# Altium PCB 000.000.001 rev.2.PcbDoc
Units mm, origin at the board's own origin, x right, y up, seen from the top; angles counter-clockwise.
Board outline 111 x 55 mm, 2 copper layers (Top Layer, Bottom Layer), stack 1.571 mm thick; 79 components, 88 nets, 351 pads, 348 vias.
Unrouted connection lines stored in the file: 42.
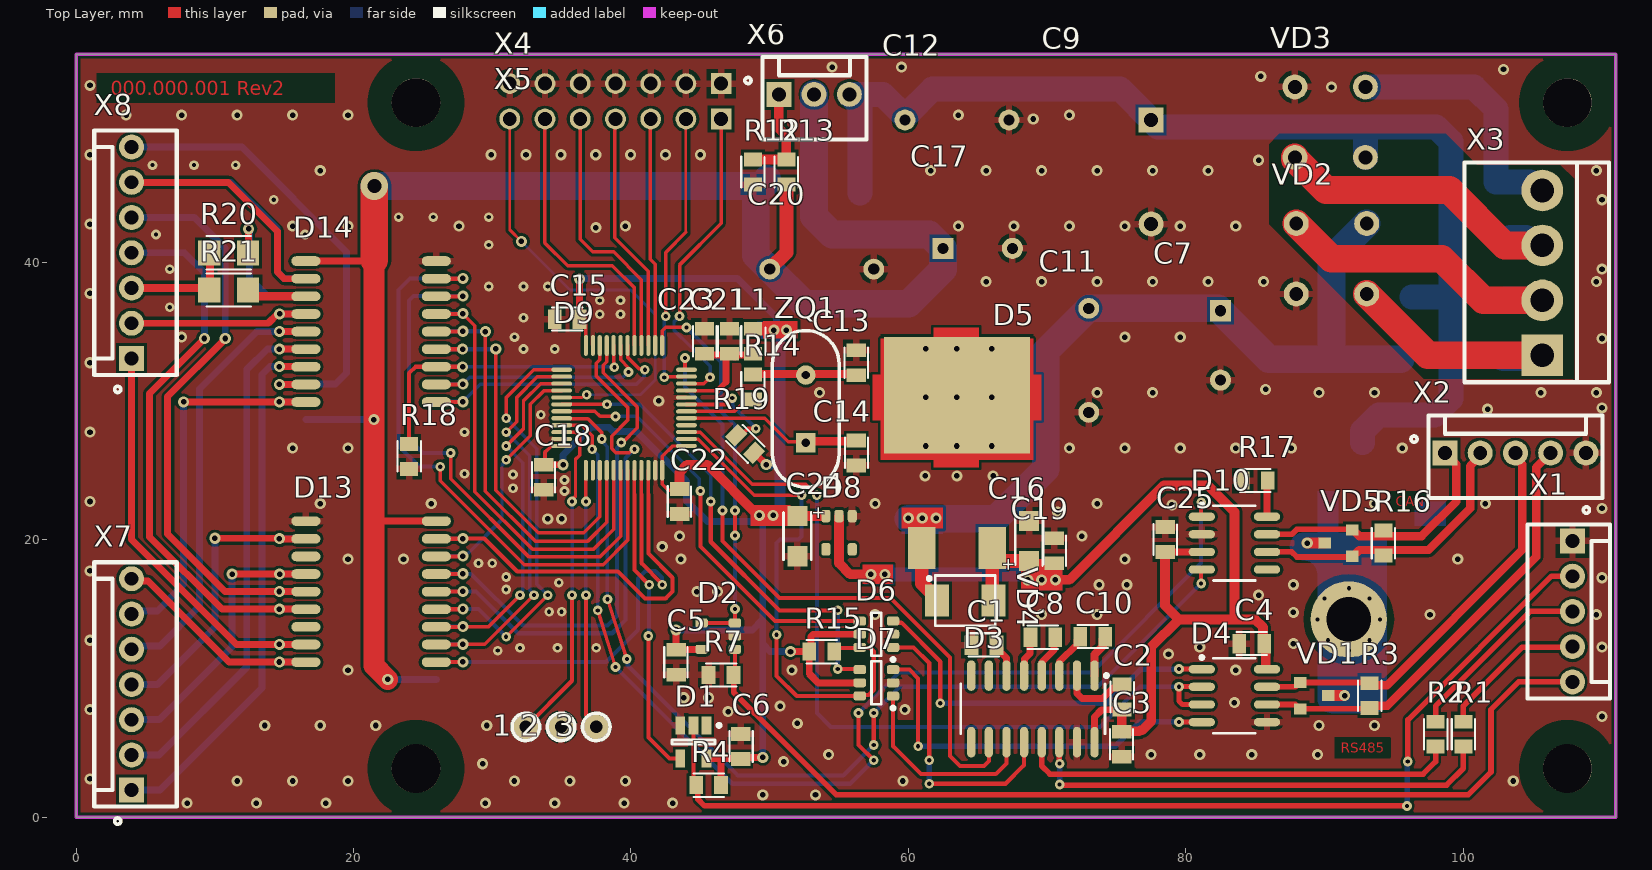
[diagram p0: Top Layer view]
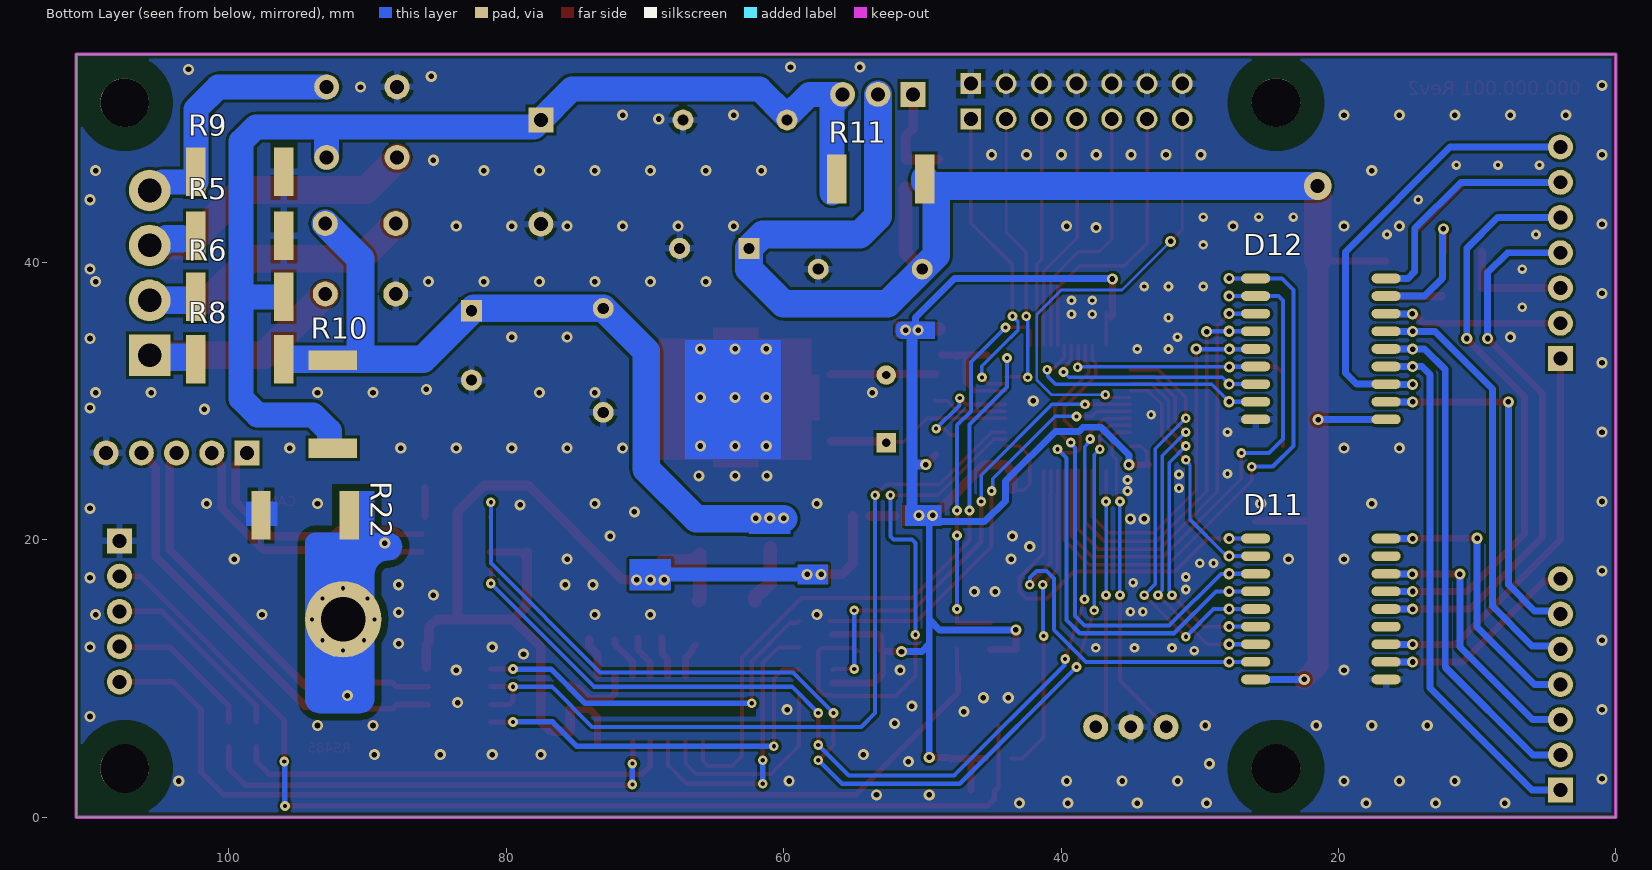
[diagram p1: Bottom Layer view, seen from below]
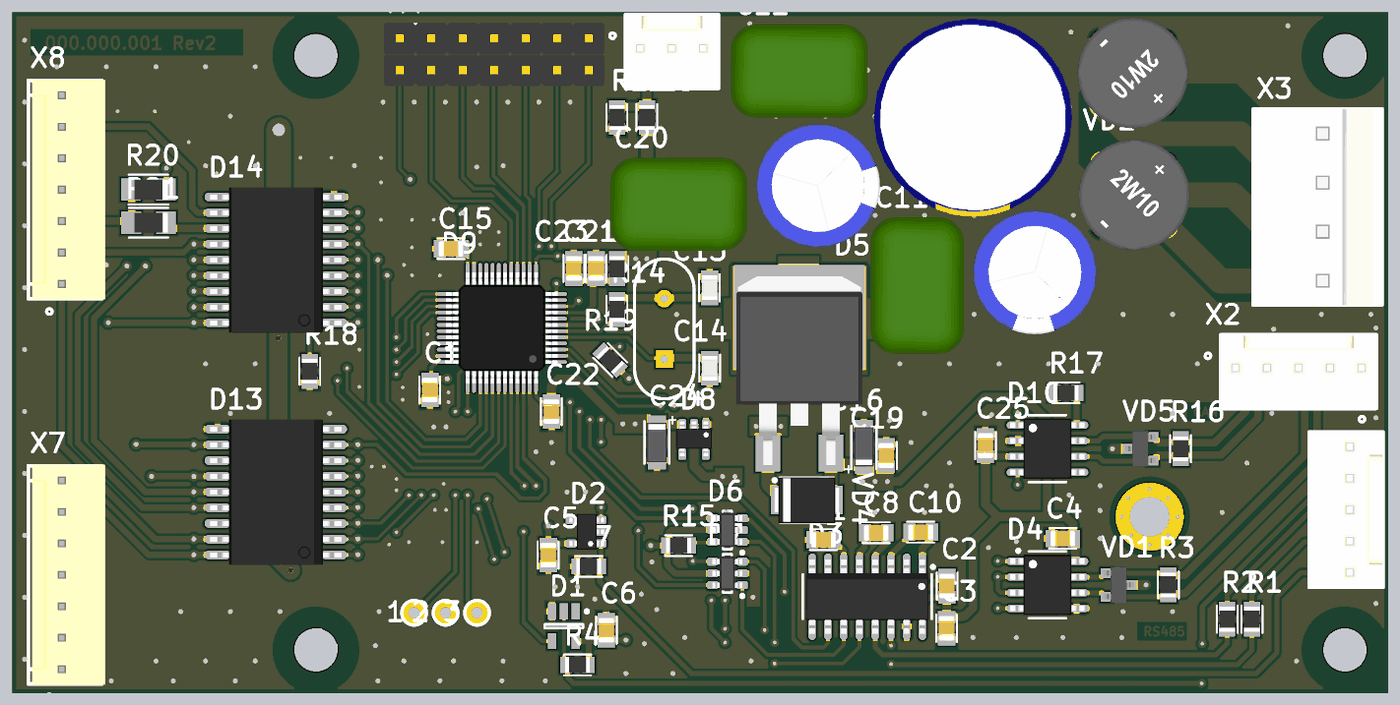
[diagram p2: 3D render of the assembled board from above, using the file's embedded part models]
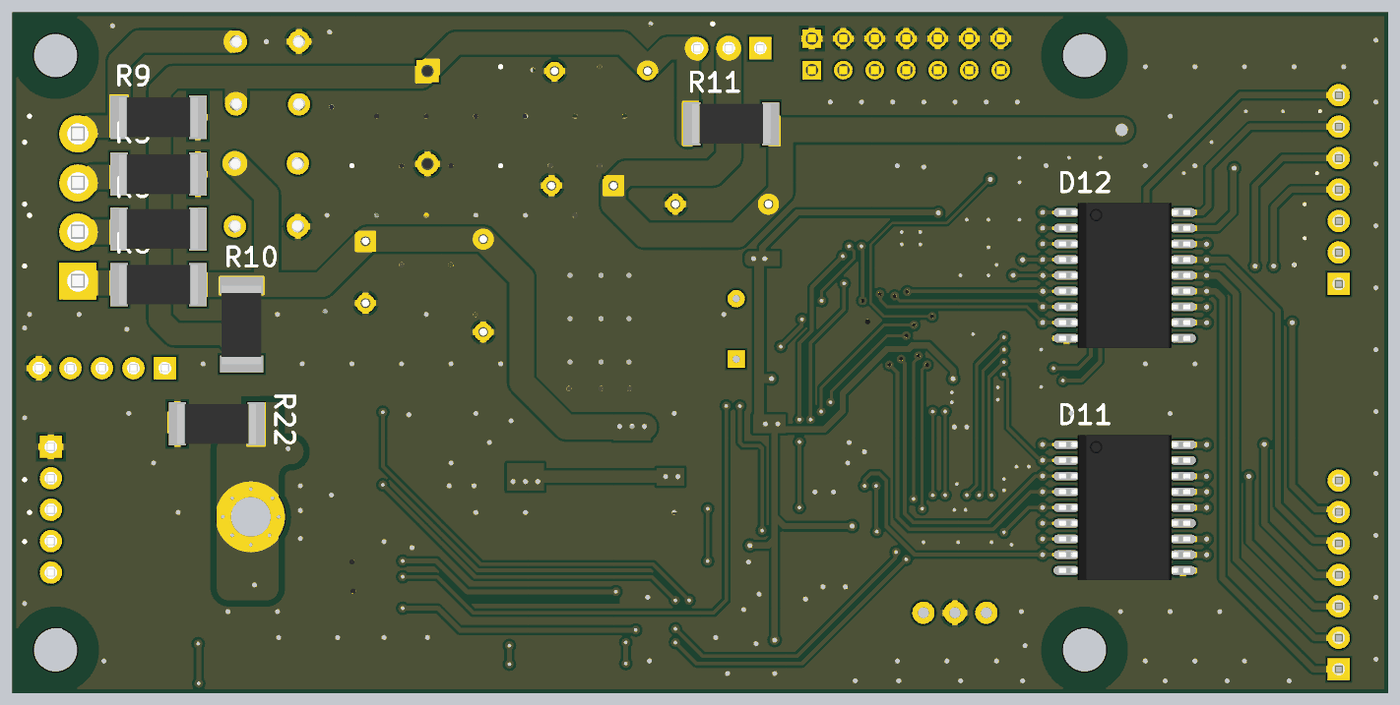
[diagram p3: 3D render of the assembled board from below, using the file's embedded part models]

## Layer stack, top to bottom
Top Solder: solder mask 0.0102, Solder Resist, Dk 3.5
Top Layer: signal copper 0.0356
Dielectric 1: dielectric 1.5, FR-4, Dk 4.8
Bottom Layer: signal copper 0.0356
Bottom Solder: solder mask 0.0102, Solder Resist, Dk 3.5

## Board outline
0,0 111,0 111,55 0,55

## Design rules (kind name [scope] priority, off if disabled: settings)
BoardOutlineClearance BoardOutlineClearance_Connector [(InComponentClass('Connectors') OR OnLayer('Bottom Overlay') OR OnLayer('Top Overlay'))] p1: gap=0 ignorepadtopadclearanceinfootprint=FALSE
BoardOutlineClearance [All] p2: gap=0.3 ignorepadtopadclearanceinfootprint=FALSE
Clearance Clearance_GND_E [InNet('GND_E') vs InNet('GND')] p1: gap=0.5 ignorepadtopadclearanceinfootprint=FALSE
Clearance [All] p2: gap=0.2 ignorepadtopadclearanceinfootprint=FALSE except(0.3: Arc-Poly)
ComponentClearance [All] p1: gap=0 collisioncheckmode=3 verticalgap=0 showdistances=FALSE
Height [All] p1: minheight=0 maxheight=50 prefheight=12.7
HoleSize [All] p1: absolutevalues=TRUE maxlimit=5 minlimit=0.025 maxpercent=80.000 minpercent=20.000
MinimumSolderMaskSliver [All] p1: minsoldermaskwidth=0
PolygonConnect PolygonConnect_MCU [InComponent('D9')] p1: thpad.connectstyle=Relief thpad.reliefconductorwidth=0.3 thpad.reliefentries=4 thpad.polygonreliefangle="90 Angle" thpad.airgapwidth=0.254 smdpad.connectstyle=Relief smdpad.reliefconductorwidth=0.3 smdpad.reliefentries=4 smdpad.polygonreliefangle="90 Angle" smdpad.airgapwidth=0.254 via.connectstyle=Direct via.reliefconductorwidth=0.254 via.reliefentries=4 via.polygonreliefangle="90 Angle" via.airgapwidth=0.254
PolygonConnect [All] p2: thpad.connectstyle=Relief thpad.reliefconductorwidth=0.5 thpad.reliefentries=4 thpad.polygonreliefangle="90 Angle" thpad.airgapwidth=0.3 smdpad.connectstyle=Relief smdpad.reliefconductorwidth=0.5 smdpad.reliefentries=4 smdpad.polygonreliefangle="90 Angle" smdpad.airgapwidth=0.25 via.connectstyle=Direct via.reliefconductorwidth=0.254 via.reliefentries=4 via.polygonreliefangle="90 Angle" via.airgapwidth=0.254
RoutingVias [All] p1: holewidth=0.4 width=0.8 viastyle="Through Hole" minholewidth=0.3 minwidth=0.7 maxholewidth=3 maxwidth=5
SilkToSilkClearance [All] p1: silktosilkclearance=0
SilkToSolderMaskClearance [IsPad] p1: minsilkscreentomaskgap=0 clearancetoexposedcopper=TRUE
SolderMaskExpansion [All] p1: expansion=0.102 istentingtop=FALSE
Width [All] p1: maxlimit=3 minlimit=0.2 preferedwidth=0.5
24 further rules are at their usual default settings.

## Classes and differential pairs
component class Connectors: X1 X2 X3 X4 X5 X6 X7 X8

## Components (designator, comment, footprint, x,y, rotation, side; value= is the part's Value field where it differs from the comment)
1 "=Value" PADROUND 32.42,6.5 r180 top
2 "=Value" PADROUND 34.96,6.5 r180 top
3 "=Value" PADROUND 37.5,6.5 r180 top
C1 "GRM21BR71H104KA01L (0805 X7R 0,1 мкФ ±10% 50 В)" CAP0805-125 65.45,12.4 r0 top
C2 "GRM21BR71H104KA01L (0805 X7R 0,1 мкФ ±10% 50 В)" CAP0805-125 75.4,8.65 r270 top
C3 "GRM21BR71E105KA99L (0805 X7R 1 мкФ ±10% 25 В)" CAP0805-125 75.375,5.25 r90 top
C4 "GRM21BR71E105KA99L (0805 X7R 1 мкФ ±10% 25 В)" CAP0805-125 84.75,12.5 r0 top
C5 "GRM21BR71H104KA01L (0805 X7R 0,1 мкФ ±10% 50 В)" CAP0805-125 43.25,11.16 r90 top
C6 "GRM21BR71H104KA01L (0805 X7R 0,1 мкФ ±10% 50 В)" CAP0805-125 47.925,5.088 r270 top
C7 "WLR102M1EG21 (1000 мкФ 25 В 10х21)" CAPR10x21 82.5,34 r90 top
C8 "GRM21BR71H104KA01L (0805 X7R 0,1 мкФ ±10% 50 В)" CAP0805-125 69.688,12.956 r0 top
C9 "TKR222M1VK25 (2200 мкФ 35 В 16х25)" CAPR16X25 77.5,46.5 r90 top
C10 "GRM21BR71H104KA01L (0805 X7R 0,1 мкФ ±10% 50 В)" CAP0805-125 73.288,13.006 r0 top
C11 "JFA02A104J (0,1 мкФ, 100 В, 5%)" JFA11x13x7.5 73,32.925 r90 top
C12 "JFA02A104J (0,1 мкФ, 100 В, 5%)" JFA11x13x7.5 63.5,50.25 r180 top
C13 "GRM2165C1H180JD01D (0805 NP0 18 пФ ±5% 50 В)" CAP0805-060_NP0 56.25,32.75 r90 top
C14 "GRM2165C1H180JD01D (0805 NP0 18 пФ ±5% 50 В)" CAP0805-060_NP0 56.25,26.25 r270 top
C15 "GRM21BR71H104KA01L (0805 X7R 0,1 мкФ ±10% 50 В)" CAP0805-125 35.4,35.9 r0 top
C16 "TECAP4.7/10VA10 ( тип А 4,7 мкФ 10 В ±10%)" 3216-18 68.7,19.9 r90 top
C17 "WLR102M1EG21 (1000 мкФ 25 В 10х21)" CAPR10X21 65,41 r180 top
C18 "GRM21BR71H104KA01L (0805 X7R 0,1 мкФ ±10% 50 В)" CAP0805-125 33.7,24.5 r90 top
C19 "GRM21BR71H104KA01L (0805 X7R 0.1 мкФ ±10% 50 В)" CAP0805-125 70.5,19.2 r270 top
C20 "JFA02A104J (0,1 мкФ, 100 В, 5%)" JFA11x13x7.5 53.75,39.5 r180 top
C21 "GRM21BR71E105KA99L (0805 X7R 1 мкФ ±10% 25 В)" CAP0805-125 47.1,34.3 r270 top
C22 "GRM21BR71H104KA01L (0805 X7R 0,1 мкФ ±10% 50 В)" CAP0805-125 43.5,22.75 r90 top
C23 "GRM21BR71H104KA01L (0805 X7R 0,1 мкФ ±10% 50 В)" CAP0805-125 45.3,34.3 r270 top
C24 "TECAP4.7/10VA10 ( тип А 4,7 мкФ 10 В ±10%)" 3216-18 52,20.25 r270 top
C25 "GRM21BR71E105KA99L (0805 X7R 1 мкФ ±10% 25 В)" CAP0805-125 78.5,20 r270 top
D1 "SN74AHC1G14DRLR" SOT23-5AM 44.5,5.413 r270 top
D2 "LMV321ILT" SOT23-5 46.291,13.045 r180 top
D3 "ST232BDR" SO16_N 68.975,7.8 r270 top
D4 "ST485ECDR" SOIC8N_L 83.5,8.75 r0 top
D5 "L78M05ABDT-TR" D2PAK 63.5,24.9 r0 top locked
D6 "SN74LVC1G3157DBVR" SOT23-6 57.69,13.18 r180 top
D7 "SN74LVC1G3157DBVR" SOT23-6 57.69,9.68 r180 top
D8 "MC78LC33NTRG" SOT23-5 55,20.5 r270 top
D9 "STM32F103C8T6" LQFP-48 39.5,29.5 r180 top locked
D10 "MCP2551-I/SN" SOIC8N_L 83.5,19.75 r0 top
D11 "TD62783AFG" SOP-18 21.266,15 r180 bottom
D12 "ULN2803ADWR" SOP-18 21.266,33.75 r180 bottom
D13 "TD62783AFG" SOP-18 21.266,16.25 r180 top
D14 "ULN2803ADWR" SOP-18 21.266,35 r180 top
L1 "LQM21PN4R7NGR (0805 4,7 мкГн 0,8 А 288 мОм)" LQM21-G 48.8,34.3 r270 top
R1 "RC0805FR-07240RL (0805 240 Ом ±1%)" RES0805-050 100,5.975 r270 top
R2 "RC0805FR-07240RL (0805 240 Ом ±1%)" RES0805-050 98,5.975 r270 top
R3 "RC0805FR-07120RL (0805 120 Ом ±1%)" RES0805-050 93.25,8.75 r270 top
R4 "RC0805FR-0710KL (0805 10 кОм ±1%)" RES0805-050 45.6,2.3 r180 top
R5 "RC2512FR-070RL (1206 0 Ом)" RES2512-055 99.2,41.92 r0 bottom
R6 "RC2512FR-070RL (1206 0 Ом)" RES2512-055 99.2,37.5 r0 bottom
R7 "RC0805FR-07150RL (0805 150 Ом ±1%)" RES0805-050 46.5,10.25 r180 top
R8 "RC2512FR-070RL (1206 0 Ом)" RES2512-055 99.2,33 r0 bottom
R9 "RC2512FR-070RL (1206 0 Ом)" RES2512-055 99.2,46.52 r0 bottom
R10 "RC2512FR-070RL (1206 0 Ом)" RES2512-055 92.5,29.75 r90 bottom
R11 "RC2512FR-070RL (1206 0 Ом)" RES2512-055 53,46 r180 bottom
R12 "RC0805FR-071K6L (0805 1,6 кОм ±1)" RES0805-050 48.8,46.5 r90 top
R13 "RC0805FR-07150RL (0805 150 Ом ±1%)" RES0805-050 51.2,46.5 r90 top
R14 "RC0805JR-0722R (0805 22 Ом ±5%)" RES0805-050 48.8,31 r90 top
R15 "RC0805FR-0710KL (0805 10 кОм ±1%)" RES0805-050 53.75,11.93 r180 top
R16 "RC0805FR-07120RL (0805 120 Ом ±1%)" RES0805-050 94.25,19.75 r90 top
R17 "RC0805FR-0727KL (0805 27 кОм ±1%)" RES0805-050 85,24.25 r0 top
R18 "RC0805FR-0710KL (0805 10 кОм ±1%)" RES0805-050 24,26 r270 top
R19 "RC0805FR-0710KL (0805 10 кОм ±1%)" RES0805-050 48.233,26.9 r315 top
R20 "RC1206FR-071KL (1206 1 кОм ±1%)" RES1206-055 10.99,40.68 r180 top
R21 "RC1206FR-071KL (1206 1 кОм ±1%)" RES1206-055 11,38 r180 top
R22 "RC2512FR-070RL (1206 0 Ом)" RES2512-055 94.5,21.75 r180 bottom
VD1 "CDSOT23-SM712" SOT23 89.25,8.75 r0 top
VD2 "2W10G-E4/51" 2W10 90.5,40.25 r270 top
VD3 "2W10G-E4/51" 2W10 90.4,50.1 r180 top
VD4 "S1G" DO-214AA 64.1,15.6 r0 top
VD5 "PESD2CAN,215" SOT23 91,19.75 r180 top
X1 "DS1070-5MVV6 (WF-05)" WF-05 107.875,14.825 r270 top locked
X2 "DS1070-5MVV6 (WF-05)" WF-05 103.759,26.25 r0 top locked
X3 "DS1072-4MVT6 (PWL-4)" PWL-4 105.7,39.23 r270 top
X4 "Соединитель штыревой PLS-7" PLS-2.54-7 46.5,52.876 r270 top
X5 "Соединитель штыревой PLS-7" PLS-2.54-7 46.5,50.325 r270 top
X6 "Connector 3" WF-03 53.2,52.1 r0 top value="DS1070-3MVV6 (WF-03)"
X7 "" WF-07 4,9.56 r90 top value="DS1070-7MVV6 (WF-7)"
X8 "" WF-07 4,40.68 r90 top value="DS1070-7MVV6 (WF-7)"
ZQ1 "8.000MHzHC-49US" KX-3H_spacer 52.6,29.425 r90 top

## Footprints (in the part's own frame and the unit in brackets; to place one, negate y for a bottom-side part, rotate by r counter-clockwise, add the part's x,y. Pads: shape width x height; smd on the part's side, far side on the other; paste and mask are expansions set on the pad)
2W10 [mm]
  round 1.8 hole 1: +(-2.54,2.54) -(2.54,-2.54) ~A(2.54,2.54) ~B(-2.54,-2.54)
  body extent -4.5,-4.5 4.5,4.5, height 7.3
3216-18 [mm] "Case A Tantalum"
  rect 1.45x1.45 smd: 1(-1.45,0) 2(1.45,0)
  silkscreen extent -1.7,-1 1.7,1, body extent -1.6,-0.8 1.6,0.8, height 1.53
CAP0805-060_NP0 [mm] "Chip capacitor, Body 2.0x1.2mm"
  rect 1x1.4 smd: 1(-0.9,0) 2(0.9,0)
  silkscreen extent -1.11,-0.83 1.1,0.85, body extent -1,-0.63 1,0.62, height 0.52
CAP0805-125 [mm] "Chip capacitor, Body 2.0x1.2mm 1.25 mm thickness"
  rect 1x1.4 smd: 1(-0.9,0) 2(0.9,0)
  silkscreen extent -1.11,-0.83 1.1,0.85, body extent -1,-0.63 1,0.63, height 1.42
CAPR10x21 [mm] "Pitch 5.0"
  rect 1.524x1.524 hole 0.8: 1(2.5,0)
  round 1.524 hole 0.8: 2(-2.5,0)
  body extent -5,-5 5,5, height 21.05
CAPR10X21 [mm] "Pitch 5.0"
  rect 1.524x1.524 hole 0.8: 1(2.5,0)
  round 1.524 hole 0.8: 2(-2.5,0)
  body extent -5,-5 5,5, height 21.05
CAPR16X25 [mm] "Pitch 7.5"
  rect 1.8x1.8 hole 1: 1(3.75,0)
  round 1.8 hole 1: 2(-3.75,0)
  body extent -8.01,-8 8,8, height 25.51
D2PAK [mm] "D2-PAK/TO-263-AB; 3 Leads (1 Cropped); Body 15.5 (inc. leads) x 10.5 mm (LxW max)"
  rect 2x3 smd: 1(-2.54,-5.5) 3(2.54,-5.5)
  rect 10.55x8.4 smd: 2(0,5.5)
  body extent -5.08,-6.5 5.08,8.76, height 4.88
DO-214AA [mm] "Diode"
  rect 1.72x2.3 smd: A(2.035,0) K(-2.035,0)
  silkscreen extent -2.72,-1.81 2.16,1.81, body extent -2.65,-1.85 2.65,1.85, height 2.2
JFA11x13x7.5 [mm] "JFA Mylar capacitor"
  round 1.5 hole 0.8: 1(-3.75,0) 2(3.75,0)
  body extent -5.5,-3.75 5.5,3.75, height 15
KX-3H_spacer [mm] "Quartz resonator with spacer"
  rect 1.4x1.4 hole 0.6: 1(-2.44,0)
  round 1.4 hole 0.6: 2(2.44,0)
  silkscreen extent -5.65,-2.4 5.65,2.4, body extent -5.68,-2.5 5.68,2.5, height 4.6
LQFP-48 [mm]
  oval 1.5x0.3 smd: 1(-4.5,2.75) 2(-4.5,2.25) 3(-4.5,1.75) 4(-4.5,1.25) 5(-4.5,0.75) 6(-4.5,0.25) 7(-4.5,-0.25) 8(-4.5,-0.75) 9(-4.5,-1.25) 10(-4.5,-1.75) 11(-4.5,-2.25) 12(-4.5,-2.75) 25(4.5,-2.75) 26(4.5,-2.25) 27(4.5,-1.75) 28(4.5,-1.25) 29(4.5,-0.75) 30(4.5,-0.25) 31(4.5,0.25) 32(4.5,0.75) 33(4.5,1.25) 34(4.5,1.75) 35(4.5,2.25) 36(4.5,2.75)
  oval 0.3x1.5 smd: 13(-2.75,-4.5) 14(-2.25,-4.5) 15(-1.75,-4.5) 16(-1.25,-4.5) 17(-0.75,-4.5) 18(-0.25,-4.5) 19(0.25,-4.5) 20(0.75,-4.5) 21(1.25,-4.5) 22(1.75,-4.5) 23(2.25,-4.5) 24(2.75,-4.5) 37(2.75,4.5) 38(2.25,4.5) 39(1.75,4.5) 40(1.25,4.5) 41(0.75,4.5) 42(0.25,4.5) 43(-0.25,4.5) 44(-0.75,4.5) 45(-1.25,4.5) 46(-1.75,4.5) 47(-2.25,4.5) 48(-2.75,4.5)
  body extent -4.5,-4.5 4.5,4.5, height 1.5
LQM21-G [mm] "Inductor"
  rect 1x1.3 smd: 1(-0.9,0) 2(0.9,0)
  silkscreen extent -1,-0.9 1,0.9, body extent -1,-0.63 1,0.62, height 0.82
PADROUND [mm] "Pad Round"
  round 1.8 hole 0.9: 1(0,0)
  silkscreen extent -1,-1 1,1
PLS-2.54-7 [mm]
  rect 1.5x1.5 hole 1: 1(0,0)
  round 1.5 hole 1: 2(0,-2.54) 3(0,-5.08) 4(0,-7.62) 5(0,-10.16) 6(0,-12.7) 7(0,-15.24)
  body extent -1.27,-16.51 1.27,1.27, height 8.54
PWL-4 [mm] "3.96"
  rect 3x3 hole 1.7: 1(5.94,0)
  round 3 hole 1.7: 2(1.98,0) 3(-1.98,0) 4(-5.94,0)
  silkscreen extent -7.96,-5.6 7.88,4.8, body extent -7.95,-5.59 7.89,4.81, height 13.8
RES0805-050 [mm] "Chip Resistor, Body 2.0x1.2mm, IPC High Density"
  rect 1x1.3 smd: 1(-0.9,0) 2(0.9,0)
  silkscreen extent -1.11,-0.83 1.1,0.85, body extent -1,-0.63 1,0.62, height 0.42
RES1206-055 [mm] "Chip resistor"
  rect 1.6x1.8 smd: 1(-1.4,0) 2(1.4,0)
  silkscreen extent -1.6,-1.2 1.6,1.2, body extent -1.55,-0.8 1.55,0.8, height 0.47
RES2512-055 [mm] "Resistor"
  rect 1.4x3.5 smd: 1(-3.175,0) 2(3.175,0)
  body extent -3.18,-1.6 3.17,1.6, height 0.57
SO16_N [mm] "SOIC, 16-Leads, Body 9.9x3.9mm, Pitch 1.27mm, IPC Medium Density"
  oval 2.2x0.6 smd: 1(-2.4,4.445) 2(-2.4,3.175) 3(-2.4,1.905) 4(-2.4,0.635) 5(-2.4,-0.635) 6(-2.4,-1.905) 7(-2.4,-3.175) 8(-2.4,-4.445) 9(2.4,-4.445) 10(2.4,-3.175) 11(2.4,-1.905) 12(2.4,-0.635) 13(2.4,0.635) 14(2.4,1.905) 15(2.4,3.175) 16(2.4,4.445)
  silkscreen extent -2.52,-5.2 1.8,5.42, body extent -3,-4.96 3,4.96, height 1.54
SOIC8N_L [mm] "SOIC, 8-Leads, Body 4.9x3.9mm, Pitch 1.27mm, IPC High Density"
  oval 1.9x0.6 smd: 1(-2.35,1.905) 2(-2.35,0.635) 3(-2.35,-0.635) 4(-2.35,-1.905) 5(2.35,-1.905) 6(2.35,-0.635) 7(2.35,0.635) 8(2.35,1.905)
  silkscreen extent -2.47,-2.7 1.5,2.88, body extent -3,-2.45 3,2.45, height 1.67
SOP-18 [mm]
  oval 2.1x0.7 smd: 1(-4.7,5.08) 2(-4.7,3.81) 3(-4.7,2.54) 4(-4.7,1.27) 5(-4.7,0) 6(-4.7,-1.27) 7(-4.7,-2.54) 8(-4.7,-3.81) 9(-4.7,-5.08) 10(4.7,-5.08) 11(4.7,-3.81) 12(4.7,-2.54) 13(4.7,-1.27) 14(4.7,0) 15(4.7,1.27) 16(4.7,2.54) 17(4.7,3.81) 18(4.7,5.08)
  body extent -5.3,-5.87 5.3,5.87, height 2.57
SOT23 [mm]
  rect 0.9x0.8 smd: 1(-1,0.95) 1(-1,0.95) 2(-1,-0.95) 3(1,0)
  body extent -1.24,-1.46 1.24,1.46, height 0.94
SOT23-5 [mm]
  rrect50% 0.9x0.65 smd: 1(-1.2,0.95) 2(-1.2,0) 3(-1.2,-0.95) 4(1.2,-0.95) 5(1.2,0.95)
  body extent -1.45,-1.45 1.35,1.45, height 1.37
SOT23-5AM [mm] "SOT23, 5-Leads, Body 2.9x1.7mm, Pitch 0.95mm, Lead Span 2.8mm, IPC Low Density"
  rect 1.3x0.7 smd: 1(-1.2,0.95) 2(-1.2,0) 3(-1.2,-0.95) 4(1.2,-0.95) 5(1.2,0.95)
  silkscreen extent -1.32,-1.55 0.15,1.98, body extent -0.9,-1.55 0.9,1.55, height 1.45
SOT23-6 [mm]
  rrect50% 0.9x0.65 smd: 1(-1.2,0.95) 2(-1.2,0) 3(-1.2,-0.95) 4(1.2,-0.95) 5(1.2,0) 6(1.2,0.95)
  silkscreen extent -1.33,-1.55 0.35,1.95, body extent -1.21,-1.4 1.21,1.4, height 1.01
WF-03 [mm] "2.54"
  rect 1.8x1.8 hole 1: 1(-2.54,0)
  round 1.8 hole 1: 2(0,0) 3(2.54,0)
  silkscreen extent -4.99,-3.25 3.77,2.7, body extent -3.73,-3.2 3.77,2.6, height 11.62
WF-05 [mm] "2.54"
  rect 1.8x1.8 hole 1: 1(-5.08,0)
  round 1.8 hole 1: 2(-2.54,0) 3(0,0) 4(2.54,0) 5(5.08,0)
  silkscreen extent -7.53,-3.25 6.27,2.7, body extent -6.35,-3.17 6.35,2.63, height 11.64
WF-07 [mm] "2.54"
  rect 1.8x1.8 hole 1: 1(-7.62,0)
  round 1.8 hole 1: 2(-5.08,0) 3(-2.54,0) 4(0,0) 5(2.54,0) 6(5.08,0) 7(7.62,0)
  silkscreen extent -10.07,-3.25 8.81,2.7, body extent -8.89,-3.5 8.89,2.4, height 11.48

## Part data
1 2 3: library part Point
C1 C2 C3 C4 C5 C6 C8 C10 C11 C12 C13 C14 C15 C18 C19 C20 C21 C22 C23 C25: library part Capacitor
  C1 C2 C3 C4 C5 C6 C8 C10 C15 C18 C19 C21 C22 C23 C25: Cost=7, Visible="0,1 мк"
  C11 C12 C20: Cost=6, Visible="0,1 мк"
  C13 C14: Cost=6, Visible=18
C7 C9 C16 C17 C24: library part CAP_POL
  C7 C17: Cost=16, Visible="1000 мк"
  C9: Cost=40, Visible="2200 мк"
  C16 C24: Cost=8, Visible="4,7 мк"
D4: "RS485 приемопередатчик"
D5: library part LM7805CV, Cost=15
D6 D7: "Аналоговый переключатель, двухпозиционный"
D8: library part MC78LC00
D10: "CAN приемопередатчик"
D11 D13: library part UTC62783, Cost=47
D12 D14: library part ULN2803, Cost=55
L1: library part L, Cost=14, Visible="4,7 мкГн"
R1 R2 R3 R4 R5 R6 R7 R8 R9 R10 R11 R12 R13 R14 R15 R16 R17 R18 R19 R20 R21 R22: library part Resistor
  R1 R2: Cost=0.9, Visible=240
  R3 R16: Cost=0.9, Visible=120
  R4 R15 R18 R19: Cost=0.9, Visible="10 к"
  R5 R6 R8 R9 R10 R11 R22: Cost=0,9, Visible=0
  R7 R13: Cost=0.9, Visible=150
  R12: Cost=0,9, Visible="1.6 k"
  R14: Cost=0.9, Visible=22
  R17: Cost=0.9, Visible=27k
  R20 R21: Cost=0.8, Visible="1 к"
VD1: "ESD for RS485"
VD2 VD3: library part "Diode bridge", "Diode", Cost=27
VD4: library part Diode, "Diode", Cost=3
VD5: "Diode zener"
X1 X2: library part "Connector 5", Cost=6
X3: library part "Connector 4", Cost=6
X4 X5: library part PLS-7
X7 X8: library part Connector_7, Cost=6
ZQ1: library part Quartz, Cost=15
D2: Cost=14
D3: Cost=22
D9: Cost=220
X6: Cost=5

## Free pads (board coordinates)
  round 3.5 hole 3.5 unplated: MH(24.5,3.5) MH(24.5,51.5) MH(107.5,3.5) MH(107.5,51.5)
  round 5.5 hole 3.2 unplated: MH(91.75,14.25)

## Via types
v1: diameter 0.8, hole 0.4, Top Layer to Bottom Layer, tented both sides, 231 vias
v2: diameter 0.7, hole 0.3, Top Layer to Bottom Layer, tented both sides, 116 vias
v3: diameter 2, hole 1, Top Layer to Bottom Layer, tented both sides, 1 vias

## Nets (pads, with @x,y where several pads share a name; then routed paths per layer and width w, separated by ;. In a path a pad name is that pad's centre, name@x,y a point inside that pad or via, vN(x,y) a via of type N, cw(c..) or ccw(c..) an arc to the next point about the centre after c; other vN are vias at no path point)
3,3: C5.2 C6.2 C15.2 C18.2 C22.2 C24.1 D1.5 D2.5 D6.5 D7.5 D8.3 D9.1 D9.24 D9.36 D9.48 L1.1 R4.1 R15.2 R19.2 | length 125.8
  Top Layer w0.25: C18.2 C18.2@33.8,25.5 ; 33.8,26.3 34.24,26.74 34.99,26.74 D9.36 ; C15.2@36.4,35.9 36.3,36 C15.2@36.4,36.1 ; D9.24 C15.2@36.75,36.4 ; C22.2@43.5,23.55 42.7,23.55 42.25,24 D9.48 42.25,26 43,26.75 D9.1
  Top Layer w0.3: C18.2@33.8,25.5 33.8,26.3
  Top Layer w0.5: C18.2 v1(35.1,25.4) ; v1(36.3,38.79) 36.3,36.2 C15.2@36.4,36.1 ; v1(43.25,13.5) C5.2 43.285,12.095 D2.5 ; D1.5 46.35,4.213 ; R4.1@46.5,1.95 46.5,4.063 46.35,4.213 ; R19.2@49.013,26.15 49.061,26.102 v1(49.75,25.413) ; v1(49.5,4.3) 48.037,4.3 C6.2 47.9,4.213 46.35,4.213 ; v1(51.5,11.93) R15.2 ; D7.5 53.5,9.68 52.85,10.33 R15.2 ; D6.5 53.143,13.18 52.977,13.014 52.977,12.057 R15.2
  Top Layer w0.7: C22.2@43.6,23.75 C22.2 43.5,24.847 44.053,25.4 45.5,25.4 49.15,21.75 v1(49.25,21.75) ; C24.1 D8.3@53.75,21.7
  Top Layer w1: L1.1 50.2,35.2 v1(50.3,35.1)
  Bottom Layer w0.5: v1(35.1,25.4) 35.1,26.1 37.1,28.1 38.4,28.1 38.7,27.8 40.411,27.8 44,24.211 44,22.8 45.5,21.3 49.475,21.3 v1@49.925,21.75 ; v1@36.65,38.83 47.67,38.83 50.5,36 50.5,35.3 v1(50.3,35.1) ; v1(43.25,13.5) 48.75,13.5 49.5,14.25 ; v1@49.375,21.75 49.5,21.625 49.5,14.25 ; v1(49.5,4.3) 49.5,12.46 ; v1(51.5,11.93) 50.03,11.93 49.5,12.46 ; 49.5,12.46 49.5,14.25
  Bottom Layer w0.7: v1(49.75,25.413) 50.737,25.413 50.75,25.426
  Bottom Layer w0.8: 50.75,21.75 50.75,25.426 50.75,35
  other v1: 50.25,21.75 51.2,35.1
5,0: C2.2 C3.2 C4.2 C16.1 C19.2 C25.2 D3.16 D4.8 D5.3 D8.2 D10.3 VD4.A | length 81.6
  Top Layer w0.5: D3.16 73.42,7.22 73.938,7.738 C2.2@75.387,7.738 ; C25.2 78.515,19.115 D10.3 ; C25.2@78.7,18.85 C25.2@78.85,19
  Top Layer w0.7: D8.2 55,19.7 55,18.3 55.8,17.5 v1(57.3,17.5) ; v1(70.6,17.1) 71.6,17.1 78.4,23.9 81.6,23.9 83.5,22 83.5,14.25 ; C3.2 C3.2@75.387,6.162 ; C2.2 75.387,7.738 C3.2@75.387,6.162 ; C25.2 78.5,15.25 79.5,14.25 ; D4.8@85.75,10.8 85.75,12.4 C4.2 85.558,12.592 85.558,13.692 85,14.25 83.5,14.25 ; C3.2@75.387,6.162 75.405,6.18 76.63,6.18 76.711,6.261 76.861,6.261 77.5,6.9 77.5,12.25 79.5,14.25 ; 79.5,14.25 83.5,14.25
  Top Layer w1: VD4.A 66.04,15.695 66.04,18.95 66.54,18.45 C16.1
  Bottom Layer w1: v1(57.3,17.5) v1(58.3,17.5) ; v1@58.7,17.5 69.2,17.5
  other v1: 68.6,17.1 69.6,17.1
485_R\E\: D4.2 D4.3 D9.3 | length 59.1
  Top Layer w0.25: D9.3 45,27.75 48.75,24 52.6,24 v2(53.4,23.2) ; D4.2@81.135,9.4 D4.2
  Top Layer w0.35: D4.2@81.135,9.4 v2(79.5,9.4) 79.5,8.365 79.75,8.115 D4.3
  Bottom Layer w0.3: v2(53.4,23.2) 53.4,7.5 54.4,6.5 73.8,6.5 76.7,9.4 v2(79.5,9.4)
A: D12.14 D14.15 X7.2 | length 39.2
  Top Layer w0.5: v1(14.652,33.74) 16.556,33.74 D14.15
  Bottom Layer w0.5: X7.2 5.98,4.48 12.3,10.8 12.3,32.255 13.785,33.74 v1(14.652,33.74) 14.657,33.745 D12.14@16.561,33.745
AN0: D11.11 D13.18 X7.7 | length 16.9
  Top Layer w0.5: X7.7 4.162,17.018 5.172,17.018 11.01,11.18 v1(14.652,11.18) ; v1@14.74,11.19 14.75,11.18 16.556,11.18 D13.18
  Bottom Layer w0.5: v1@14.612,11.22 14.642,11.19 D11.11
AN1: D11.18 D13.11 X7.4 | length 22.2
  Top Layer w0.5: v1(10,20.1) 14.602,20.1 14.642,20.06 v1(14.652,20.07) ; v1@14.74,20.06 D13.11@16.25,20.06
  Bottom Layer w0.5: X7.4 5.86,9.56 10,13.7 v1(10,20.1) ; v1(14.652,20.07) 14.657,20.075 16.561,20.075 D11.18
AN2: D11.16 D13.13 X7.3 | length 22.1
  Top Layer w0.5: v1(11.25,17.52) 11.12,17.52 11.11,17.53 14.652,17.53 v1(14.662,17.52) ; v1@14.75,17.52 D13.13
  Bottom Layer w0.5: X7.3 6.02,7.02 11.25,12.25 v1(11.25,17.52) ; v1(14.662,17.52) 16.546,17.52 D11.16
AN3: D11.15 D13.14 X8.5 | length 43.5
  Top Layer w0.5: v1(10.75,34.5) 10.75,34.46 6.6,30.31 6.6,20.4 10.74,16.26 v1(14.652,16.26) ; v1@14.74,16.26 16.556,16.26 D13.14
  Bottom Layer w0.5: X8.5 8.53,43.22 10.75,41 v1(10.75,34.5) ; v1(14.652,16.26) 14.657,16.265 16.561,16.265 D11.15
AN4: D11.14 D13.15 X8.4 | length 41.8
  Top Layer w0.5: v1(9.25,34.5) 5.3,30.55 5.3,20.2 10.51,14.99 v1(14.652,14.99) ; v1@14.74,14.99 16.556,14.99 D13.15
  Bottom Layer w0.5: X8.4 7.82,40.68 9.25,39.25 v1(9.25,34.5) ; v1(14.652,14.99) 14.657,14.995 16.561,14.995 D11.14
AN5: D11.12 D13.17 X8.1 | length 30.6
  Top Layer w0.5: X8.1 4,20 11.55,12.45 v1(14.652,12.45) ; v1@14.74,12.45 16.556,12.45 D13.17
  Bottom Layer w0.5: v1(14.652,12.45) 14.657,12.455 16.561,12.455 D11.12
ANODE0: D9.45 D11.8 D13.1 | length 32.7
  Top Layer w0.25: 40.75,23.25 D9.45
  Top Layer w0.3: D13.1 27.861,11.17 v1(27.881,11.19) ; 40.75,23.25 40.75,18.302 42.25,16.802 v2(42.25,16.75)
  Bottom Layer w0.3: D11.8 v1(27.881,11.19) 38.19,11.19 40.5,13.5 40.5,17.2 41.05,17.75 41.75,17.75 42.234,17.266 42.234,16.766 v2(42.25,16.75)
ANODE1: D9.46 D11.1 D13.8 | length 30.4
  Top Layer w0.25: 41.25,23.25 D9.46
  Top Layer w0.3: D13.8 v1@27.861,20.06 ; v1(27.881,20.08) 29.42,20.08 31.8,17.7 39.05,17.7 41,15.75 42.5,15.75 43,16.25 43,17.25 41.25,19 41.25,23.25
  Bottom Layer w0.3: D11.1 v1(27.881,20.08)
ANODE2: D9.21 D11.3 D13.6 | length 38.1
  Top Layer w0.25: D9.21 38.25,32.83 38,32.58 38,32.025 40.462,29.563 40.462,28.062 39.4,27 v2(39.3,27)
  Top Layer w0.3: D13.6 v1@27.861,17.52
  Bottom Layer w0.3: D11.3 v1(27.881,17.54) 27.892,17.529 28.471,17.529 32.2,13.8 38.3,13.8 39,14.5 39,26.624 39.3,26.924 v2(39.3,27)
ANODE3: D9.22 D11.4 D13.5 | length 40.6
  Top Layer w0.25: D9.22 37.75,32.966 37.5,32.716 37.5,31.794 39.75,29.544 39.75,28.6 38.6,27.45 38.6,26.571 38.907,26.264 39.879,26.264 40.136,26.521 v2(40.25,26.521)
  Top Layer w0.3: D13.5 v1@27.861,16.25
  Bottom Layer w0.3: D11.4 28.83,16.27 31.85,13.25 38.65,13.25 39.6,14.2 39.6,25.871 v2(40.25,26.521)
  other v1: 27.881,16.27
ANODE4: D9.25 D11.5 D13.4 | length 32.3
  Top Layer w0.25: v2(31,13) v2(34,16) ; v2(31,28.75) 31,30.25 33,32.25 D9.25
  Top Layer w0.3: D13.4 v1@27.861,14.98
  Bottom Layer w0.25: v2(31,28.75) 33.2,26.55 33.2,16.8 v2(34,16)
  Bottom Layer w0.3: D11.5 29,15 v2(31,13)
  other v1: 27.881,15
ANODE5: D9.26 D11.7 D13.2 | length 29.7
  Top Layer w0.25: v1(27.881,12.46) 29.46,12.46 v2(33,16) ; v2(31,27.75) 31.75,28.5 31.75,30.25 33.25,31.75 D9.26
  Top Layer w0.3: D13.2 v1@27.861,12.44
  Bottom Layer w0.25: v2(31,27.75) 32.7,26.05 32.7,16.371 33,16.071 v2(33,16)
  Bottom Layer w0.3: D11.7 v1(27.881,12.46)
ANODE6: D9.27 D11.6 D13.3 | length 27.2
  Top Layer w0.25: v1(27.881,13.73) 29.73,13.73 v2(32,16) ; v2(31,26.75) 32.25,28 32.25,30 33.49,31.24 34.99,31.24 D9.27
  Top Layer w0.3: D13.3 v1@27.861,13.71
  Bottom Layer w0.25: v2(31,26.75) 32.2,25.55 32.2,16.322 32,16.122 v2(32,16)
  Bottom Layer w0.3: D11.6 v1(27.881,13.73)
ANODE7: D9.28 D11.2 D13.7 | length 19.5
  Top Layer w0.25: v2(31,25.75) 32.75,27.5 32.75,29.75 33.75,30.75 D9.28
  Top Layer w0.3: D13.7 v1@27.861,18.79
  Bottom Layer w0.25: v1(27.881,18.81) 28.03,18.81 28.238,19.018 28.268,19.018 30.7,21.45 30.7,25.379 31,25.679 v2(31,25.75)
  Bottom Layer w0.3: D11.2 v1(27.881,18.81)
B: D12.13 D14.16 X7.1 | length 40.4
  Top Layer w0.5: v1(14.652,32.47) 16.556,32.47 D14.16
  Bottom Layer w0.5: X7.1 6.04,1.94 13.4,9.3 13.4,31.9 13.97,32.47 v1(14.652,32.47) 14.657,32.475 D12.13@16.561,32.475
BOOT: D1.2 R4.2 X1.2 | length 79.2
  Top Layer w0.3: D1.2 44.5,2.15 R4.2@44.7,1.95
  Top Layer w0.4: R4.2@44.7,1.95 44.716,1.95 44.816,1.85 44.816,1.284 45.3,0.8 v2(95.95,0.8) ; v2(96,4) 96,7 106.365,17.365 X1.2
  Bottom Layer w0.4: v2(95.95,0.8) 95.95,3.95 v2(96,4)
BOOT0: D1.4 D9.44 | length 22.7
  Top Layer w0.25: 40.25,23.25 D9.44
  Top Layer w0.3: 40.25,23.25 40.25,17.812 v2(41.313,16.75) ; v2(41.252,13.052) 41.252,5.748 42.787,4.213 D1.4
  Bottom Layer w0.3: v2(41.252,13.052) 41.305,13.105 41.305,16.75 v2(41.313,16.75)
C: D12.16 D14.13 X8.2 | length 14.8
  Top Layer w0.5: X8.2 13.85,35.6 14.52,36.27 v1(14.662,36.27) D14.13
  Bottom Layer w0.5: v1(14.662,36.27) 16.546,36.27 D12.16
CAN_H: D10.7 R16.2 VD5.2 X2.1 | length 18.6
  Top Layer w0.4: D10.7@86.1,20.385 87.635,20.385 88,20.75 91.95,20.75 VD5.2
  Top Layer w0.6: VD5.2 92.05,20.7 92.5,20.25 97,20.25 99.5,22.75 99.5,25.429 X2.1
CAN_L: D10.6 R16.1 VD5.1 X2.2 | length 20.3
  Top Layer w0.4: D10.6@86.1,19.115 87.635,19.115 88,18.75 91.95,18.75 VD5.1@92,18.8
  Top Layer w0.6: VD5.1@92,18.8 92.05,18.8 92.5,19.25 97.5,19.25 100.5,22.25 100.5,25.299 101.219,26.018 X2.2
CAN_RX: D9.32 D10.4 | length 73.3
  Top Layer w0.25: D9.32 35.614,28.75 35.639,28.725 36.901,28.725 37.876,27.75 37.876,27.275 v2(37.901,27.25) ; v2(38.3,15.7) v2(39.7,11.4)
  Top Layer w0.3: v2(57.5,5.2) v2(57.5,7.5) ; v2(81.1,16.836) 81.1,17.795 D10.4
  Bottom Layer w0.25: v2(37.901,27.25) 37.901,27.128 38.088,26.941 38.088,26.912 38.3,26.7 v2(38.3,15.7)
  Bottom Layer w0.3: v2(39.7,11.4) 39.766,11.334 39.766,10.934 47.7,3 55.3,3 v2(57.5,5.2) ; v2(57.5,7.5) 59.4,9.4 73.664,9.4 v2(81.1,16.836)
CAN_TX: D9.33 D10.1 | length 80.9
  Top Layer w0.25: D9.33 36.437,28.25 37.2,27.487 v2(37.2,26.521) ; v2(37.6,14.9) v2(38.882,10.815)
  Top Layer w0.3: v2(56.4,7.5) 56.4,5.2 v2(57.5,4.1) ; v2(81.1,22.7) 81.1,21.705 D10.1
  Bottom Layer w0.25: v2(37.2,26.521) 37.6,26.121 v2(37.6,14.9)
  Bottom Layer w0.3: v2(38.882,10.815) 47.297,2.4 55.8,2.4 v2(57.5,4.1) ; v2(56.4,7.5) 59.327,10.427 73.225,10.427 81.1,18.303 v2(81.1,22.7)
CATH1: D9.18 D12.8 D14.1 | length 20.6
  Top Layer w0.25: D9.18 39.75,33.15 40.564,32.336 40.914,32.336 v2(41,32.25)
  Top Layer w0.3: D14.1 27.861,29.92 v1(27.881,29.94)
  Bottom Layer w0.25: v1(27.881,29.94) 29.141,31.2 40.4,31.2 40.962,31.762 40.962,32.212 v2(41,32.25)
  Bottom Layer w0.3: D12.8 v1(27.881,29.94)
CATH2: D9.19 D12.7 D14.2 | length 18.3
  Top Layer w0.25: D9.19 39.25,32.955 39.814,32.391 v2(39.814,32.086)
  Top Layer w0.3: D14.2 v1@27.861,31.19
  Bottom Layer w0.25: v1(27.881,31.21) 28.371,31.7 39.428,31.7 v2(39.814,32.086)
  Bottom Layer w0.3: D12.7 v1(27.881,31.21)
CATH3: D9.20 D12.6 D14.3 R18.1 | length 24.2
  Top Layer w0.25: D9.20 38.75,32.65 39,32.4 38.9,32.3 38.8,32.4 v2(38.8,32.425)
  Top Layer w0.3: R18.1@24,26.75 24,32 24.46,32.46 D14.3 v1(27.861,32.46)
  Bottom Layer w0.25: v1(27.861,32.46) 38.765,32.46 v2(38.8,32.425)
  Bottom Layer w0.3: D12.6 25.986,32.5 26.026,32.46 v1(27.861,32.46)
CATH4: D9.39 D12.5 D14.4 | length 29
  Top Layer w0.25: v1(30.25,33.75) 30.25,23.55 33.3,20.5 36.6,20.5 37.75,21.65 D9.39
  Top Layer w0.3: D14.4 v1(27.861,33.73)
  Bottom Layer w0.3: D12.5 25.986,33.73 v1(27.861,33.73) 30.23,33.73 v1(30.25,33.75)
CATH5: D9.40 D12.4 D14.5 | length 31.5
  Top Layer w0.25: v1(29.5,35) 29.5,23.5 33.1,19.9 36.9,19.9 38.25,21.25 D9.40
  Top Layer w0.3: D14.5 v1@27.861,35
  Bottom Layer w0.3: D12.4 v1(27.881,35.02) 29.48,35.02 v1(29.5,35)
CATH6: D9.41 D12.3 D14.6 | length 33.6
  Top Layer w0.25: v1(27.881,36.29) 28.75,35.421 28.75,23.45 32.9,19.3 37.3,19.3 38.75,20.75 D9.41
  Top Layer w0.3: D14.6 27.861,36.27 v1(27.881,36.29)
  Bottom Layer w0.3: D12.3 v1(27.881,36.29)
CATH7: D9.42 D12.2 D14.7 | length 41.2
  Top Layer w0.25: v2(27,26.25) 27,24.4 32.65,18.75 37.75,18.75 39.25,20.25 D9.42
  Top Layer w0.3: D14.7 27.861,37.54 v1(27.881,37.56)
  Bottom Layer w0.3: v2(27,26.25) 25,26.25 24,27.25 24,37.25 24.31,37.56 D12.2 v1(27.881,37.56)
CATH8: D9.43 D12.1 D14.8 | length 44.5
  Top Layer w0.25: v2(26.25,25.25) 26.25,24.25 32.3,18.2 38,18.2 39.75,19.95 D9.43
  Top Layer w0.3: D14.8 27.861,38.81 v1(27.881,38.83)
  Bottom Layer w0.3: v2(26.25,25.25) 26.234,25.266 24.734,25.266 23.25,26.75 23.25,38 24.08,38.83 D12.1 v1(27.881,38.83)
D: D12.18 D14.11 X8.6 | length 34.4
  Top Layer w0.5: X8.6 10.99,45.76 14.52,42.23 14.52,39.29 15,38.81 D14.11
  Bottom Layer w0.5: X8.6 11.17,45.76 14.5,42.43 14.5,39.33 15,38.83 D12.18
DBG1: D9.10 X5.1 | length 23
  Top Layer w0.25: v2(43.5,36.1) 43.5,39.8 46.5,42.8 X5.1 ; D9.10 45.25,31.25 v2(45.7,31.7)
  Bottom Layer w0.25: v2(43.5,36.1) 43.1,35.7 43.1,35.1 44.3,33.9 45.7,32.5 v2(45.7,31.7)
DBG2: D9.11 X5.2 | length 20.9
  Top Layer w0.2: 43.95,42.15 X5.2@43.95,50.325
  Top Layer w0.25: v2(42.4,31.7) 42.45,31.75 D9.11 ; v2(42.5,36.1) 42.5,40.7 43.95,42.15
  Bottom Layer w0.25: v2(42.4,31.7) 42.4,35.978 42.522,36.1 v2(42.5,36.1)
DBG3: D9.14 X5.3 | length 16.5
  Top Layer w0.25: X5.3 41.4,50.305 41.4,40.2 41.75,39.85 D9.14
DBG4: D9.15 X5.4 | length 17.3
  Top Layer w0.25: X5.4@38.825,50.3 38.825,41.775 41.25,39.35 41.25,38.7 D9.15
DBG5: D9.16 X5.5 | length 19
  Top Layer w0.25: X5.5@36.335,50.325 36.335,41.665 37.25,40.75 38.75,40.75 40.75,38.75 D9.16
DBG6: D9.17 X5.6 | length 20.9
  Top Layer w0.25: X5.6@33.795,50.325 33.795,41.385 35.43,39.75 38.65,39.75 40.25,38.15 D9.17
DBG7: D9.29 X5.7 | length 33
  Top Layer w0.2: X5.7 31.26,42.34 v1(32.1,41.5) ; D9.29 36.469,30.25 36.665,30.446 v2(36.8,30.446)
  Bottom Layer w0.2: v1(32.1,41.5) 35.599,38.001 39.986,38.001 41.75,36.237 41.75,31.5 40.696,30.446 v2(36.8,30.446)
DP: R20.2 R21.2 X8.3 | length 8.3
  Top Layer w0.6: X8.3 9.607,38.14 9.655,38.188 R20.2@9.655,40.775
E: D12.12 D14.17 X8.7 | length 34.5
  Top Layer w0.5: X8.7 X8.7@4.025,48.275 ; v1(14.652,31.19) D14.17
  Bottom Layer w0.5: X8.7 11.95,48.3 19.5,40.75 19.5,32 18.71,31.21 D12.12 16.546,31.19 v1(14.652,31.19)
F: D12.11 D14.18 X7.6 | length 28.5
  Top Layer w0.5: v1(7.75,29.93) v1(14.652,29.93) 16.556,29.93 D14.18
  Bottom Layer w0.5: X7.6 4.222,14.862 5.862,14.862 7.75,16.75 v1(7.75,29.93) ; v1(14.652,29.93) 14.657,29.935 D12.11@16.561,29.935
G: D12.15 D14.14 X7.5 | length 33.2
  Top Layer w0.5: v1(14.652,35.01) 16.556,35.01 D14.14
  Bottom Layer w0.5: X7.5 4.242,12.342 6.042,12.342 8.9,15.2 8.9,30.87 13.04,35.01 v1(14.652,35.01) 14.657,35.015 D12.15@16.561,35.015
GND: 2.1 C1.1 C3.1 C4.1 C5.1 C6.1 C7.2 C9.2 C11.1 C12.1 C13.2 C14.2 C15.1 C16.2 C17.2 C18.1 C19.1 C20.1 C21.1 C22.1 C23.1 C24.2 C25.1 D1.3 D2.2 D3.15 D4.5 D5.2 D6.2 D7.2 D8.1 D9.8 D9.23 D9.35 D9.47 D10.2 D11.10 D12.9 D13.10 D14.9 R5.1 R7.2 R9.1 R12.1 R17.1 R18.2 R22.1 VD2.- VD3.- X1.1 X2.5 X4.1 X4.2 X4.3 X4.4 X4.5 X4.6 X4.7
  other v1: 8,1 13,1 18,1 29.5,1 34.5,1 39.5,1 43,1 49.5,1.6 53.3,1.6 11.6,2.6 15.6,2.6 19.6,2.6 31.6,2.6 35.6,2.6 39.6,2.6 59.6,2.6 103.6,2.6 1,2.75 29.3,3.846 51,4 54.25,4.5 77.5,4.5 81,4.5 84.75,4.5 89.5,4.5 13.6,6.6 17.6,6.6 21.6,6.6 29.6,6.6 89.6,6.6 93.6,6.6 52,6.75 110,7.25 47,7.6 1,7.75 59.75,7.75 50.75,8 83.5,8.25 43.8,8.6 45.6,8.6 19.6,10.6 51.6,10.6 83.6,10.6 78.75,11.75 81,12.25 110,12.25 87.75,12.5 1,12.75 57.6,14.6 69.6,14.6 73.6,14.6 97.6,14.6 109.6,14.6 87.75,14.75 85.25,16 44.75,16.25 46.25,16.25 73.75,16.75 75.75,16.75 87.75,16.75 110,17.25 1,17.75 19.6,18.6 23.6,18.6 43.6,18.6 75.6,18.6 99.6,18.6 42.25,19.5 43.5,20.25 72.5,20.25 34,21.5 35,21.5 70.75,22 110,22.25 79,22.5 17.6,22.6 25.6,22.6 57.6,22.6 73.6,22.6 93.6,22.6 101.6,22.6 1,22.75 61.2,24.6 63.5,24.6 66.1,24.6 15.6,26.6 19.6,26.6 71.6,26.6 75.6,26.6 79.6,26.6 83.6,26.6 87.6,26.6 95.6,26.6 61.25,26.75 63.5,26.75 66,26.75 1,27.75 101.75,29.4 110,29.5 42,30 61.25,30.25 63.5,30.25 66,30.25 53.6,30.6 73.6,30.6 77.6,30.6 89.6,30.6 93.6,30.6 105.6,30.6 109.6,30.6 85.75,30.83 1,32.75 61.25,33.75 63.5,33.75 66,33.75 110,34.5 7.6,34.6 75.6,34.6 79.6,34.6 1,37.75 65.6,38.6 69.6,38.6 73.6,38.6 77.6,38.6 81.6,38.6 85.6,38.6 109.6,38.6 110,39.5 37.469,42.5 15.6,42.6 19.6,42.6 27.6,42.6 39.6,42.6 63.6,42.6 67.6,42.6 71.6,42.6 75.6,42.6 79.6,42.6 83.6,42.6 1,42.75 110,44.5 17.6,46.6 61.6,46.6 65.6,46.6 69.6,46.6 73.6,46.6 77.6,46.6 81.6,46.6 109.6,46.6 85.25,47.348 1,47.75 29.917,47.75 32.431,47.75 34.945,47.75 37.459,47.75 39.972,47.75 42.486,47.75 45,47.75 69,50.325 3.6,50.6 7.6,50.6 11.6,50.6 15.6,50.6 19.6,50.6 63.6,50.6 71.6,50.6 90.5,52.627 1,52.75 85.4,53.4 102.9,53.9 54.5,54.06 59.5,54.06
  other v2: 30.4,12 32,12.2 34.7,12.2 37.5,12.2 34.1,14.8 35,14.8 31,16.4 34.8,16.9 31,17.3 29,18.3 30,18.3 35.2,23.5 31.5,23.7 35.2,24.3 31.5,24.7 28,24.75 28,27.75 33.5,29 32.25,33.75 34.5,33.75 31.6,34.6 32.25,36 37.75,36.25 39.25,36.25 6.75,36.75 37.75,37.25 39.25,37.25 29.75,38.25 32.25,38.25 34,38.25 6.75,39.5 29.75,41.25 5.75,42 16.5,42 23.25,43.25 25.75,43.25 29.75,43.25 14.25,44.5 5.5,47 8.5,47 11.5,47
GND_E: pad.MH@91.75,14.25 R22.2 VD1.3 VD5.3 | length 2.5
  Top Layer w0.8: v1(88.75,19.745) 89.711,19.745 89.716,19.75 VD5.3 ; VD1.3 v1(91.45,8.75)
  other v2: 91.75,12 90.25,12.75 93.25,12.75 89.5,14.25 94,14.25 90,15.75 93.25,15.75 91.75,16.5
LOOP: D2.1 R7.1 X1.5 | length 72.7
  Top Layer w0.3: R7.1 47.491,10.341 D2.1
  Top Layer w0.4: R7.1 47.4,9 50.6,5.8 54.8,1.6 100.35,1.6 102,3.25 102,7.75 103.995,9.745 X1.5
LOWPOWER: C7.1 C11.2 D5.1 R8.1 R10.2 VD2.+ VD4.K | length 63.2
  Top Layer w1: D5.1 60.96,16.836 61.546,16.25 61.705,16.25 62.065,15.89 VD4.K
  Bottom Layer w2: v1@60,21.5 66.3,21.5 69.9,25.1 69.9,33.575 C11.2 82.325,36.675 C7.1 86,33 R8.1@95.5,33 ; 90.5,33.29 90.5,40.25 VD2.+
  other v1: 60,21.55 61,21.55 62,21.55
NetC1_2: C1.2 D3.6 | length 2.5
  Top Layer w0.5: C1.2 66.6,12.15 66.6,11.95 67.068,11.482 67.068,10.202 D3.6
NetC2_1: C2.1 D3.2 | length 5.1
  Top Layer w0.5: D3.2 72.15,8.9 72.5,8.55 74,8.55 74.75,9.3 75.15,9.3 C2.1
NetC8_1: C8.1 D3.5 | length 2.9
  Top Layer w0.5: D3.5 68.359,10.219 68.359,11.409 68.75,11.8 C8.1@68.75,12.918
NetC8_2: C8.2 D3.4 | length 3
  Top Layer w0.5: D3.4 69.629,10.219 69.629,11.179 70.5,12.05 C8.2@70.5,12.868
NetC10_1: C10.1 D3.3 | length 3.1
  Top Layer w0.5: D3.3 70.899,10.219 70.899,11.199 72.138,12.438 C10.1@72.138,12.756
NetC10_2: C10.2 D3.1 | length 2.9
  Top Layer w0.6: D3.1 73.42,11.72 74,12.3 C10.2@74,12.818
NetC13_1: C13.1 R14.2 ZQ1.2 | length 7.6
  Top Layer w0.6: R14.2@49.111,31.94 52.3,31.94 53,31.94 56.56,31.94 C13.1@56.6,31.9
  Bottom Layer w0.6: ZQ1.2@52.394,31.795 ZQ1.2@52.474,31.715
NetD10_8: D10.8 R17.2 | length 2.1
  Top Layer w0.5: D10.8 85.85,23.7 R17.2@85.9,23.75
NetD12_17: D12.17 R20.1 | length 9.9
  Top Layer w0.5: R20.1@12.39,40.78 12.435,40.825 v1(12.435,42.405)
  Bottom Layer w0.5: v1@12.5,42.5 12.5,38.845 13.785,37.56 D12.17
NetD14_12: D14.12 R21.1 | length 4
  Top Layer w0.6: R21.1@12.56,37.54 D14.12
NetR1_1: R1.1 X1.4 | length 10.8
  Top Layer w0.4: R1.1 100,8 104.25,12.25 107.84,12.25 X1.4
NetR2_1: R2.1 X1.3 | length 13.8
  Top Layer w0.4: R2.1 98,8 104.825,14.825 X1.3
NetR5_2: R5.2 VD3.~A X3.3 | length 23
  Top Layer w2: VD3.~A 87.86,47.44 90.1,45.2 99,45.2 102.99,41.21 X3.3
  Bottom Layer w2: 103.4,41.7 104.503,41.7 104.802,41.401 105.509,41.401 X3.3
NetR6_2: R6.2 VD2.~B X3.2 | length 22.6
  Top Layer w2: VD2.~B 90.5,40.25 98.45,40.25 101.45,37.25 X3.2
  Bottom Layer w2: 103.101,37.25 X3.2
NetR8_2: R8.2 VD2.~A X3.1 | length 17.4
  Top Layer w2: VD2.~A 97.46,33.29 X3.1
  Bottom Layer w2: R8.2@102.9,33.145 105.555,33.145 X3.1
NetR9_2: R9.2 VD3.~B X3.4 | length 19.1
  Bottom Layer w1.8: VD3.~B 100.76,52.64 102.375,51.025 R9.2@102.375,46.07 ; R9.2@102.375,45.77 R9.2@102.375,46.07 ; X3.4 105.429,45.17 104.829,45.77 102.675,45.77 R9.2@102.375,46.07
NetR12_2: R12.2 R13.2 X6.1 | length 7.3
  Top Layer w0.7: R12.2@48.87,47.4 R13.2 51.2,49.1 50.66,49.64 X6.1
NRST: D9.7 R19.1 | length 8
  Top Layer w0.3: D9.7 46.85,29.75 v2(47.3,30.2) ; R19.1 47.972,27.536 48.435,28 v2(49,28)
  Bottom Layer w0.3: v2(47.3,30.2) 47.316,30.184 47.316,29.684 v2(49,28)
OSC_IN: C14.1 D9.5 ZQ1.1 | length 13.6
  Top Layer w0.25: D9.5 49.635,28.75 51.325,27.06 52.3,27.06 ZQ1.1@53,27.06
  Top Layer w0.6: ZQ1.1@53,27.06 53.04,27.1 C14.1@56.6,27.1
  Bottom Layer w0.6: ZQ1.1@52.52,26.905 ZQ1.1 ccw(c52.68,26.985) ZQ1.1@52.68,26.905
OSC_OUT: D9.6 R14.1 | length 5.4
  Top Layer w0.25: D9.6 47.473,29.25 48.233,30.009 R14.1@49.111,30.009
PWR: C9.1 C12.2 R6.1 R10.1 R11.1 VD3.+ X6.3 | length 85.6
  Bottom Layer w1.8: R11.1@56.5,45 56.5,46 56.5,51.34 X6.3 56.5,52.1 58.15,52.1 59.75,50.5 61.75,52.5 75.25,52.5 C9.1@77.75,50 ; C9.1 78,49.75 98.046,49.75 99.1,48.696 99.1,37.495 ; R10.1@92.75,27 92.75,27.828 93.922,29 97.928,29 99.1,30.172 99.1,37.495 ; VD3.+ 92.94,49.5 ; R6.1@96.3,37.495 99.1,37.495
RS232_485_SEL: D6.6 D7.6 D9.2 R15.1 | length 38.2
  Top Layer w0.25: D9.2 44.85,27.25 48.9,23.2 v2(52.3,23.2)
  Top Layer w0.3: v2(50.5,13.14) 50.5,10.18 51.95,8.73 D7.6 56.568,8.808 57.128,8.808 57.5,9.18 57.5,11.93 57.25,12.18 56.54,12.18 D6.6 56.44,12.18 54.9,12.18 R15.1
  Bottom Layer w0.3: v2(50.5,13.14) 50.5,19.75 50.75,20 52.074,20 52.3,20.226 v2(52.3,23.2)
RS232_RX: D3.12 D6.1 | length 20.7
  Top Layer w0.3: D6.1 60.37,12.23 61.5,11.1 v2(61.5,4.1) ; v2(61.5,2.4) 62.227,2.4 ; 62.312,2.4 67,2.4 68.34,3.74 D3.12
  Bottom Layer w0.4: v2(61.5,2.4) v2(61.5,4.1)
RS232_TX: D3.11 D7.1 | length 14.5
  Top Layer w0.3: D7.1 58.89,5.11 60.9,3.1 66.3,3.1 67.07,3.87 D3.11
RS485_A: D4.6 R3.2 VD1.2 X2.4 | length 32.2
  Top Layer w0.4: D4.6@85.6,8.115 87.885,8.115 88.2,7.8 VD1.2 R3.2@93.25,7.8
  Top Layer w0.6: R3.2 93.436,8.036 94.536,8.036 105.25,18.75 105.25,25.201 X2.4
RS485_B: D4.7 R3.1 VD1.1 X2.3 | length 29.8
  Top Layer w0.4: D4.7@85.6,9.385 87.885,9.385 88.2,9.7 88.25,9.7 R3.1@93.25,9.7
  Top Layer w0.6: R3.1 R3.1@93.286,9.686 ; R3.1@93.5,9.5 94.5,9.5 104.25,19.25 104.25,25.435 103.759,25.925 X2.3
RS485_RX: D4.1 D6.3 | length 27.5
  Top Layer w0.25: D4.1@81.135,10.67 D4.1
  Top Layer w0.3: D6.3 59.008,14.012 59.488,14.012 62.3,11.2 v2(62.3,8.2)
  Top Layer w0.35: v2(79.5,10.67) D4.1@81.135,10.67
  Bottom Layer w0.4: v2(62.3,8.2) 74.3,8.2 76.77,10.67 v2(79.5,10.67)
RS485_TX: D4.4 D7.3 | length 28.2
  Top Layer w0.25: D4.4@81.135,6.86 D4.4
  Top Layer w0.3: D7.3@58.949,10.571 D7.3 60.07,10.63 60.7,10 v2(60.7,5.1)
  Top Layer w0.35: v2(79.5,6.86) D4.4@81.135,6.86
  Bottom Layer w0.4: v2(60.7,5.1) 74.9,5.1 76.66,6.86 v2(79.5,6.86)
RX1: D3.13 R2.2 | length 31.8
  Top Layer w0.4: D3.13 69.61,3.69 70.2,3.1 97.1,3.1 98,4 R2.2
SWCLK: 3.1 D9.37 | length 18.8
  Top Layer w0.25: v2(36.75,22.75) D9.37
  Top Layer w0.3: v2(36.75,16) 36.75,7.346 37.5,6.596 3.1
  Bottom Layer w0.25: v2(36.75,16) v2(36.75,22.75)
SWDIO: 1.1 D9.34 | length 24
  Top Layer w0.25: D9.34@35.025,27.725 D9.34 35.995,27.75 36.295,27.45 36.295,26.085 36,25.79 36,23.121 35.75,22.871 v2(35.75,22.75)
  Top Layer w0.3: 1.1 35.75,9.83 v2(35.75,16)
  Bottom Layer w0.25: v2(35.75,16) v2(35.75,22.75)
TX1: D3.14 R1.2 | length 34.1
  Top Layer w0.4: v2@70.88,4.042 D3.14 ; v2(70.9,2.35) 70.95,2.3 98.8,2.3 100,3.5 R1.2
  Bottom Layer w0.4: v2(70.9,2.35) v2(70.9,3.85)
U_LED: C17.1 C20.2 D11.9 D12.10 D13.9 D14.10 R11.2 R13.1 X6.2 | length 130.4
  Top Layer w0.5: D14.10 21.584,40.08 ; 21.469,21.33 D13.9
  Top Layer w1: C20.2 51.2,40.7 R13.1@51.2,45.33
  Top Layer w1.5: 21.469,40.08 v1(21.469,28.65) 21.469,21.33 21.469,10.915 v1(22.464,9.92)
  Top Layer w2: 21.5,40.164 v3(21.5,45.5)
  Bottom Layer w0.5: D12.10 16.576,28.66 21.469,28.66 v1(21.469,28.65) ; v1(22.464,9.92) D11.9
  Bottom Layer w2: v3(21.5,45.5) 49,45.5 ; R11.2 49.825,45.8 49.525,45.5 49,45.5 ; X6.2 53.2,43.3 54.5,42 61.5,42 C17.1 62.5,39.5 60,37 52.5,37 C20.2 49,40.5 49,45.5
USART1_RX: D6.4 D9.31 | length 30.8
  Top Layer w0.25: D9.31 37.4,29.25 37.768,28.882 v2(38.88,28.882)
  Top Layer w0.3: v2(45,23.5) 45,19.5 50.37,14.13 D6.4@56.687,14.13
  Bottom Layer w0.25: v2(38.88,28.882) 40.418,28.882 44.914,24.386 44.914,23.586 v2(45,23.5)
USART1_TX: D7.4 D9.30 | length 34.9
  Top Layer w0.25: D9.30 v2(38.264,29.75) v2@38.434,29.75
  Top Layer w0.3: v2(45.75,22.75) 45.75,19.85 50.7,14.9 v2(54.9,14.9) ; v2(54.9,10.67) 56.429,10.67 56.479,10.619 D7.4
  Bottom Layer w0.25: v2(38.264,29.75) 40.65,29.75 45.75,24.65 v2(45.75,22.75)
  Bottom Layer w0.3: v2(54.9,10.67) v2(54.9,14.9)
USART2_RX: D2.3 D2.4 D9.13 | length 28.1
  Top Layer w0.25: D9.13 42.25,35.05 42.5,35.3 v2(44,35.3)
  Top Layer w0.3: D2.4 D2.3 v2@47.491,15 ; v2(47.5,20.3) v2(47.5,22.1)
  Bottom Layer w0.3: v2(44,35.3) 46.5,32.8 46.5,29.25 47.5,28.25 v2(47.5,22.1) ; v2(47.5,15) v2(47.5,20.3)
USART2_TX: D3.10 D9.12 | length 46.8
  Top Layer w0.3: D9.12@43.9,32.25 v2(43.9,33.1) ; v2(46.6,22.1) 46.6,19.9 50.1,16.4 50.7,15.8 58.714,15.8 63,11.514 63,4.402 63.712,3.69 65.444,3.69 65.8,4.046 D3.10
  Bottom Layer w0.3: v2(43.9,33.1) 43.9,30.995 46.6,28.295 v2(46.6,22.1)
VDDA: C21.2 C23.2 D9.9 L1.2 | length 8.9
  Top Layer w0.25: D9.9 46.25,30.75 ; C21.2@47.125,33.4 C21.2@47.5,33.025
  Top Layer w0.4: 46.25,30.75 46.85,31.35
  Top Layer w0.5: C23.2@45.3,33.3 C21.2@47,33.3 ; 46.85,31.35 46.85,33.15 C21.2@47,33.3 ; L1.2@48.6,33.3 47.2,33.3 C21.2@47,33.3
pads on no net: D1.1 D3.7 D3.8 D3.9 D8.4 D8.5 D9.4 D9.38 D10.5 D11.13 D11.17 D13.12 D13.16

## Polygon pours and split planes (outlines as drawn)
GND on Bottom Layer "Bottom Layer-GND" (solid, pour order 4): 0.2,0.2 0.2,54.8 110.8,54.8 110.8,0.2
GND on Top Layer "Top Layer-GND" (solid, pour order 2): 0.2,0.2 0.2,54.8 110.8,54.8 110.8,0.2

## Keep-outs
Keep-Out Layer:
  the board outline again, w0.254

## Other copper
Top Layer:
  region net GND: 61.8,26.6 61.8,25.2 65.1,25.2 65.1,26.6
  rectangle net GND: 68.2,28.6 69.6,31.9
  region net GND: 65.1,33.9 65.1,35.3 61.8,35.3 61.8,33.9
  region net GND: 58.8,31.9 57.4,31.9 57.4,28.6 58.8,28.6
  rectangle net 5,0: 56.7,16.8 58.9,18.2
  rectangle net LOWPOWER: 59.5,20.8 62.5,22.3
  rectangle net 5,0: 68.1,16.35 71.1,18.6
  rectangle net GND: 58,25.75 69,34.5
  rectangle net 3,3: 49.5,34.5 52,35.75
  rectangle net 3,3: 48.6,21 51.5,22.5
  pour cut-out: 21,3.5 ccw(c24.5,3.5) 24.5,0 ccw(c24.5,3.5) 28,3.5 ccw(c24.5,3.5) 24.5,7 ccw(c24.5,3.5)
  pour cut-out: 21,51.5 ccw(c24.5,51.5) 24.5,48 ccw(c24.5,51.5) 28,51.5 ccw(c24.5,51.5) 24.5,55 ccw(c24.5,51.5)
  pour cut-out: 104,51.5 ccw(c107.5,51.5) 107.5,48 ccw(c107.5,51.5) 111,51.5 ccw(c107.5,51.5) 107.5,55 ccw(c107.5,51.5)
  pour cut-out: 104,3.5 ccw(c107.5,3.5) 107.5,0 ccw(c107.5,3.5) 111,3.5 ccw(c107.5,3.5) 107.5,7 ccw(c107.5,3.5)
  pour cut-out: 90.75,4.25 94.75,4.25 94.75,5.75 90.75,5.75
  pour cut-out: 94.75,23.5 94.75,22 97.25,22 97.5,22.25 97.5,23.5
  pour cut-out: 104.75,43.25 98.75,49.25 86.75,49.25 86,48.5 86,42.75 97.16,31.59 107.91,31.59 108,31.5 108,46 107,47 101,47 98.75,49.25
  pour cut-out: 67.233,2.135 64.818,4.55 69.605,4.55 70.332,3.823 70.332,2.008 67.272,2.008
  pour cut-out: 62.526,7.75 63.323,6.953 63.323,3.574 61.854,3.574 61.737,3.457 61.048,3.457 59.247,5.258 59.25,5.261 59.25,7 60.9,7 61.65,7.75
  pour cut-out: 42.939,24.35 42.657,24.35 42.581,24.425 42.581,25.863 43.306,26.587 45.044,26.587 45.559,26.072 45.491,26.004 45.491,25.961 43.711,25.961 42.939,25.189
  pour cut-out: 44.061,24.16 44.439,23.782 45.257,23.782 46.543,22.497 47.109,22.497 47.36,22.747 45.268,24.839 44.285,24.839 44.061,24.615
  pour cut-out: 39.776,19.507 38.443,18.174 38.443,18.105 38.491,18.057 39.198,18.057 40.651,16.603 40.706,16.603 40.768,16.666 40.761,16.673 40.761,16.797 39.893,17.665 39.893,19.459 39.824,19.459
  pour cut-out: 1.5,51.5 18.65,51.5 18.65,53.627 1.5,53.627
  text "000.000.001 Rev2" at 2.481,52.033 h1
  text "CAN" at 95.15,22.4 h0.7
  text "RS485" at 91.15,4.65 h0.7
Bottom Layer:
  rectangle net GND: 96.5,21 98.75,22.75
  rectangle net GND_E: 89.5,20 91,23.5
  rectangle net GND: 60.2,25.8 67.1,34.4
  rectangle net LOWPOWER: 59.5,20.4 62.5,21.9
  rectangle net 5,0: 68.1,16.35 71.1,18.6
  rectangle net 5,0: 56.8,16.75 59,18.2
  rectangle net 3,3: 48.6,21 51.25,22.5
  region net GND_E: 87.5,19.5 ccw(c88.5,19.5) 88.5,18.5 cw(c88.5,17.5) 89.5,17.5 89.5,8.5 ccw(c90.5,8.5) 90.5,7.5 93.5,7.5 ccw(c93.5,8.5) 94.5,8.5 94.5,19.75 ccw(c93.75,19.75) 93.75,20.5 88.5,20.5 ccw(c88.5,19.5)
  region net 3,3: 49.1,35.7 51.5,35.7 cw(c51.5,35.3) 51.9,35.3 51.9,34.9 cw(c51.5,34.9) 51.5,34.5 49.1,34.5
  pour cut-out: 104,3.5 ccw(c107.5,3.5) 107.5,0 ccw(c107.5,3.5) 111,3.5 ccw(c107.5,3.5) 107.5,7 ccw(c107.5,3.5)
  pour cut-out: 104,51.5 ccw(c107.5,51.5) 107.5,48 ccw(c107.5,51.5) 111,51.5 ccw(c107.5,51.5) 107.5,55 ccw(c107.5,51.5)
  pour cut-out: 21,51.5 ccw(c24.5,51.5) 24.5,48 ccw(c24.5,51.5) 28,51.5 ccw(c24.5,51.5) 24.5,55 ccw(c24.5,51.5)
  pour cut-out: 21,3.5 ccw(c24.5,3.5) 24.5,0 ccw(c24.5,3.5) 28,3.5 ccw(c24.5,3.5) 24.5,7 ccw(c24.5,3.5)
  pour cut-out: 62.085,7.682 62,7.597 62,7.25 73.859,7.25 73.952,7.157 74.3,7.505 74.3,7.792 74.19,7.682

## Text inside footprints (layer, text, board x,y; h text height)
C7: Assembly Top (Mech8) "+" at 82.9,37.7 h1.8 r90
C9: Assembly Top (Mech8) "+" at 77.8,52.7 h1.8 r90
C16: Top Overlay "+" at 67.9,17.7 h1.52 r90
C17: Assembly Top (Mech8) "+" at 61.3,41.4 h1.8 r180
C24: Top Overlay "+" at 52.8,22.45 h1.52 r270
VD2: Assembly Top (Mech8) "-" at 87.5,38.15 h2.5 r270; Assembly Top (Mech8) "+" at 92.4,42.95 h2.5 r270
VD3: Assembly Top (Mech8) "+" at 93.1,48.2 h2.5 r180; Assembly Top (Mech8) "-" at 88.3,53.1 h2.5 r180